# Altium PCB PCB1.PcbDoc (part 4 of 6)
Units mil, origin at the board's own origin, x right, y up, seen from the top; angles counter-clockwise.
Board outline 7480.32 x 4921.26 mil, 4 copper layers (Top Layer, GND, POWER, Bottom Layer), stack 23.756 mil thick; 513 components, 387 nets, 1792 pads, 594 vias.
Unrouted connection lines stored in the file: 21.
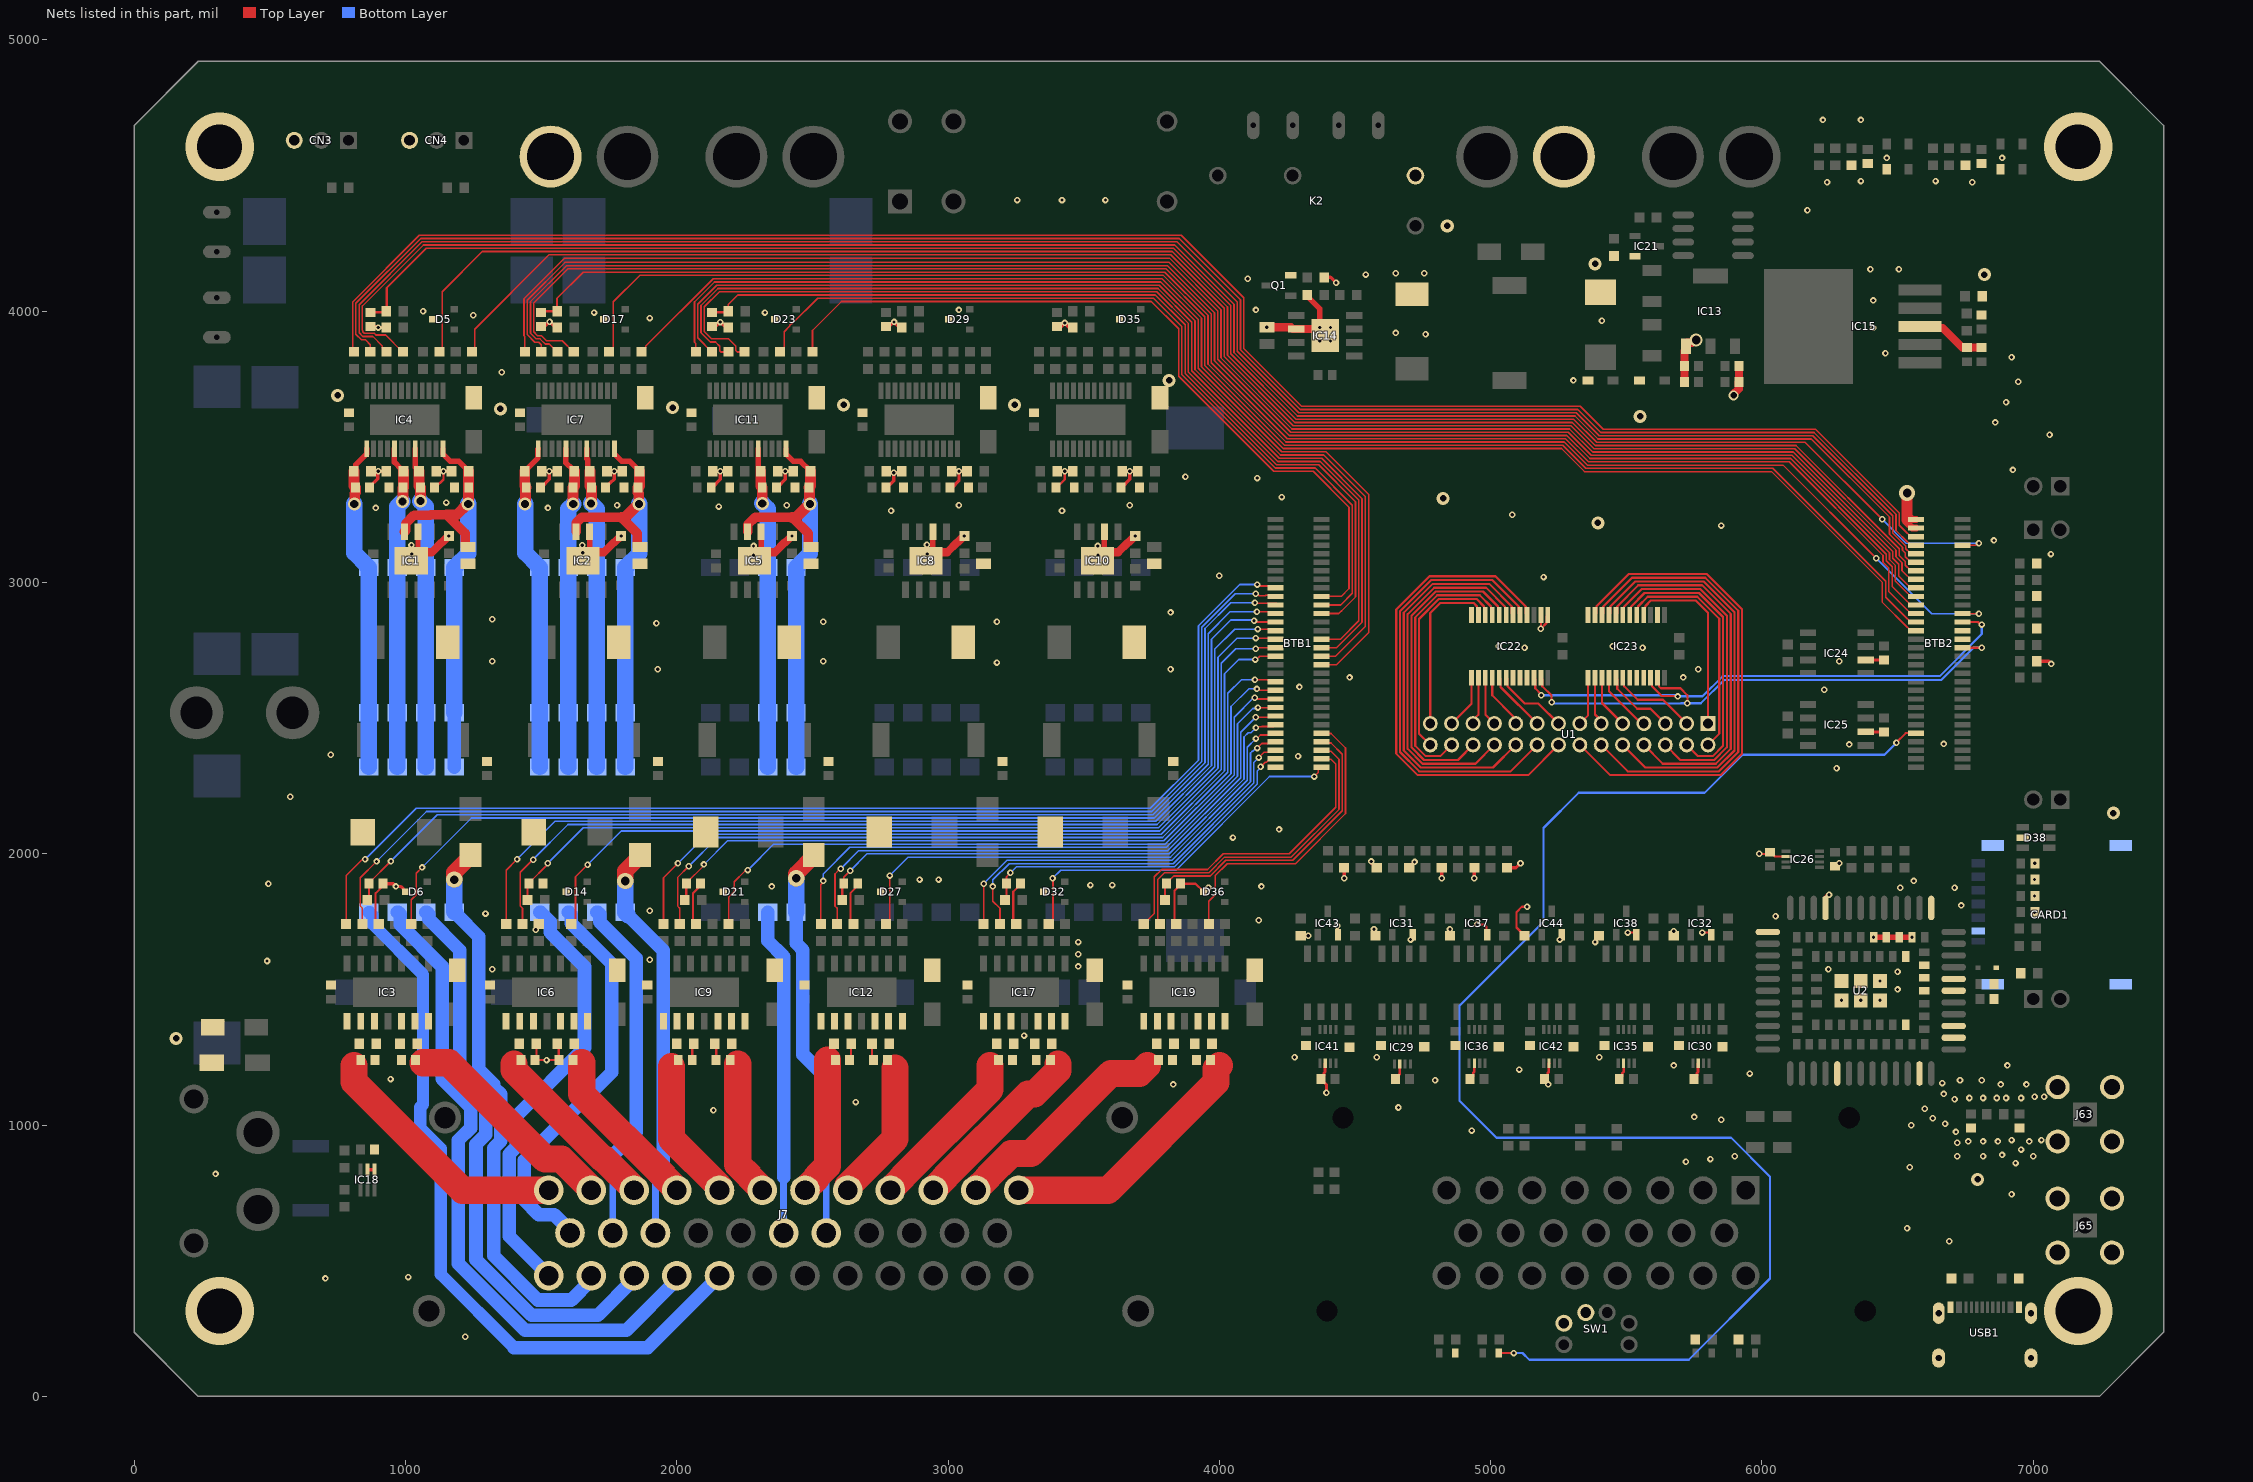
[diagram p5: the nets of this part, all layers, seen from the top]

## Via types
v1: diameter 24, hole 12, Top Layer to Bottom Layer, 532 vias
v2: diameter 48, hole 30, Top Layer to Bottom Layer, 20 vias
v3: diameter 48, hole 24, Top Layer to Bottom Layer, 16 vias
v4: diameter 48, hole 32, Top Layer to Bottom Layer, 10 vias
v5: diameter 60, hole 32, Top Layer to Bottom Layer, 7 vias
v6: diameter 251.97, hole 165.35, Top Layer to Bottom Layer, 4 vias
v7: diameter 31.5, hole 31.5, Top Layer to Bottom Layer, 2 vias
v8: diameter 47.24, hole 47.24, Top Layer to Bottom Layer, 2 vias
v9: diameter 36, hole 24, Top Layer to Bottom Layer, 1 vias

## Nets (pads, with @x,y where several pads share a name; then routed paths per layer and width w, separated by ;. In a path a pad name is that pad's centre, name@x,y a point inside that pad or via, vN(x,y) a via of type N, cw(c..) or ccw(c..) an arc to the next point about the centre after c; other vN are vias at no path point) (continued)
GND: *2.- BTB1.60 BTB2.31 BTB2.32 C1.2 C3.2 C4.2 C5.1 C6.1 C7.1 C8.1 C9.1 C10.1 C11.1 C12.1 C13.1 C15.2 C16.1 C17.1 C18.1 C19.2 C20.2 C21.1 C23.1 C24.2 C25.1 C26.1 C27.1 C28.1 C29.1 C30.1 C31.1 C32.2 C33.1 C35.2 C36.1 C37.1 C38.1 C39.2 C40.1 C41.1 C42.1 C44.2 C45.1 C46.1 C47.1 C48.1 C49.2 C50.1 C51.1 C52.1 C53.1 C54.1 C55.2 C56.1 C58.2 C59.2 C60.1 C61.1 C62.1 C63.1 C64.1 C65.1 C66.1 C67.1 C68.1 C69.1 C70.1 C71.1 C72.1 C73.1 C74.1 C75.2 C76.2 C77.1 C78.1 C79.1 C80.1 C81.1 C82.1 C83.1 C84.1 C85.1 C86.1 C87.1 C88.2 C89.2 C90.1 C91.1 C92.1 C93.1 C94.2 C95.2 C96.1 C97.2 C98.2 C99.2 C100.2 C101.2 C102.2 C103.2 C104.2 C105.2 C106.2 C107.2 C108.2 C109.2 C110.2 C111.2 CARD1.8 CARD1.9 CARD1.10 CARD1.11 CARD1.C5 CN1.- CN3.3 CN4.3 D1.2 D3.2 D4.2 D5.3 D6.3 D7.2 D8.1 D10.2 D12.2 D13.2 D14.3 D16.2 D17.3 D18.2 D20.2 D21.3 D22.2 D23.3 D25.2 D26.2 D27.3 D28.2 D29.3 D30.2 D31.2 D32.3 D33.2 D34.2 D35.3 D36.3 D37.1 D38.2 E1.2 E2.2 E5.2 E6.2 IC1.6 IC1.9 IC2.6 IC2.9 IC5.6 IC5.9 IC8.6 IC8.9 IC10.6 IC10.9 IC13.1 IC14.6 IC14.9 IC15.3 IC18.1 IC18.2 IC21.2 IC22.1 IC22.2 IC22.12 IC22.21 IC23.2 IC23.12 IC23.21 IC24.2 IC25.2 IC26.2 IC29.2 IC30.2 IC31.2 IC32.2 IC35.2 IC36.2 IC37.2 IC38.2 IC41.2 IC42.2 IC43.2 IC44.2 J63.2 J63.3 J63.4 J63.5 J65.2 J65.3 J65.4 J65.5 K2.1 LED1.2 Q1.2 R3.1 R7.1 R11.1 R13.1 R17.2 R19.2 R22.1 R23.1 R25.1 R27.1 R28.1 R32.1 R35.1 R39.2 R42.1 R45.1 R47.1 R48.2 R51.1 R53.1 R58.1 R60.1 R62.2 R64.1 R66.1 R71.1 R74.2 R77.1 R79.1 R82.1 R84.1 R87.2 R89.1 R91.1 R97.1 R100.2 R103.1 R105.1 R107.1 R112.2 R114.1 R115.1 R116.1 R123.1 R130.1 R132.1 R137.2 R138.2 R140.2 R143.1 R144.1 R148.2 R149.1 R155.2 R156.1 R157.1 R158.2 R160.2 R168.1 R170.1 R176.1 R177.2 R178.2 R181.2 R182.2 R183.2 R184.2 R187.2 R188.2 R189.2 R190.2 R193.2 R196.2 R199.2 R204.2 R205.2 R206.2 R207.2 R208.2 R211.2 R214.2 SW1.4 SW1.6 U2.1 U2.10 U2.27 U2.34 U2.36 U2.37 U2.40 U2.41 U2.45 U2.46 U2.47 U2.48 U2.70 U2.71 U2.72 U2.73 U2.88 U2.89 U2.90 U2.91 U2.92 U2.93 U2.94 U2.95 USB1.1 USB1.12 USB1.13 USB1.14 | length 7334.5
  Top Layer w8: R19.2@901.26,1741.5 890,1752.76 890,1855 917.24,1882.24 C11.1@917.24,1890 ; C9.1@1107.24,3350 1110,3350 1140,3380 v1(1140,3410) ; v1(1480,1720) 1480,1730.24 R39.2@1491.26,1741.5 R39.2@1486.57,1736.8 ; R42.1@1482.76,1300 1482.76,1245.51 C28.1@1477.24,1240 v1(1520,1240) C21.1@1565.28,1240 1565.28,1294.49 R32.1@1559.76,1300 ; C41.1@2057.24,1240 2057.24,1294.49 R64.1@2062.76,1300 ; R62.2@2071.26,1741.5 2060,1752.76 2060,1855 2087.24,1882.24 C40.1@2087.24,1890 ; R58.1@2139.76,1300 2145.28,1294.49 C38.1@2145.28,1240 ; C54.1@2637.24,1247.5 2642.76,1253.01 R89.1@2642.76,1300 ; R87.2@2651.26,1741.5 2640,1752.76 2640,1855 2667.24,1882.24 C53.1@2667.24,1890 ; R84.1@2719.76,1300 2719.76,1253.01 C52.1@2725.28,1247.5 ; R116.1@3242.76,1300 R116.1@3242.76,1300.98 ; R112.2@3251.26,1741.5 3240,1752.76 3240,1860 3267.24,1887.24 C72.1@3267.24,1890 ; C85.1@3397.24,3350 3400,3350 3430,3380 v1(3430,3410) ; R140.2@3841.26,1741.5 3835,1747.76 3835,1865 3857.24,1887.24 C82.1@3857.24,1890 3911.89,1890 D36.3@3941.89,1860 3945,1860 v1(3960,1875) ; R207.2@4300,1698.5 4300.1,1698.4 v1(4327.45,1698.4) ; v1(4435,1735) 4436.2,1733.8 4436.2,1710.39 IC43.2@4437.4,1709.19 ; v1(4570,1721.78) 4570,1703.5 R183.2@4575,1698.5 ; R188.2@4850,1698.5 v1(4850,1721.78) ; v1(4950,1740) 4975,1740 4985,1730 4985,1704.09 IC37.2@4987.4,1701.69 ; R208.2@5125,1698.5 5095,1728.5 5095,1785 5115,1805 v1(5134,1805) ; IC22.2@5185.16,2880.67 5185.08,2880.59 v1(5185.08,2829.63) 5206.02,2850.57 5206.02,2875.94 IC22.1@5210.75,2880.67 ; v1(5385,1675) 5385,1683.5 R190.2@5400,1698.5 ; v1(5505,1710) 5529.09,1710 IC38.2@5537.4,1701.69 ; v1(5780,1710) 5804.09,1710 IC32.2@5812.4,1701.69 ; v1(5990,2000) 6024.02,2000 C94.2@6030,2005.98 6032.17,2005.98 6048.15,1990 6087.83,1990 IC26.2@6087.99,1989.84 ; U2.10@6234.21,1800.55 6230,1804.76 6230,1840 6239,1849 v1(6247.21,1849) ; C89.2@6449.02,2715 C89.2@6450,2714.02 ; U2.1@6623.97,1800.55 U2.1@6625,1801.58
  Top Layer w10: C108.2@4374.02,1170 4385.35,1181.34 4385.35,1192.36 4389.25,1196.26 4389.25,1227.09 IC41.2@4390.16,1227.99 ; C100.2@4649.02,1170 4649.02,1172.17 4665,1188.15 IC29.2@4665,1225.98 ; C106.2@4924.02,1170 4935.35,1181.34 4935.35,1192.36 4939.25,1196.26 4939.25,1227.09 IC36.2@4940.16,1227.99 ; C110.2@5199.02,1170 5210.35,1181.34 5210.35,1192.36 5214.25,1196.26 5214.25,1227.09 IC42.2@5215.16,1227.99 ; C104.2@5474.02,1170 5485.35,1181.34 5485.35,1191.46 5490.16,1196.26 IC35.2@5490.16,1227.99 ; C102.2@5749.02,1170 5760.35,1181.34 5760.35,1192.36 5764.25,1196.26 5764.25,1227.09 IC30.2@5765.16,1227.99
  Top Layer w12: IC18.2@860,835.4 IC18.1@885.59,835.4 ; C16.1@867.24,3350 867.24,3352.17 897.94,3382.86 897.94,3407.94 v1(900,3410) ; C10.1@870.28,3944.02 895.98,3944.02 v1(900,3940) R17.2@928.78,3940 ; R25.1@872.76,3410 v1(900,3410) ; C11.1@917.24,1890 955,1890 v1(965,1880) 981.89,1880 D6.3@1001.89,1860 ; R22.1@929.76,3410 v1(900,3410) ; R13.1@1112.76,3410 v1(1140,3410) R3.1@1169.76,3410 ; C33.1@1497.24,3350 1500,3350 1530,3380 v1(1530,3410) ; C30.1@1500.28,3944.02 1513.77,3944.02 v1(1531.32,3961.57) 1552.9,3940 R48.2@1558.78,3940 ; R53.1@1502.76,3410 v1(1530,3410) ; R51.1@1559.76,3410 v1(1530,3410) ; C29.1@1737.24,3352.24 1770,3380 v1(1770,3410) ; R45.1@1742.76,3410 v1(1770,3410) ; R35.1@1799.76,3410 v1(1770,3410) ; C51.1@2127.24,3350 2130,3350 2160,3380 v1(2160,3410) ; C48.1@2130.28,3944.02 2144.02,3944.02 v1(2160,3960) 2180,3940 R74.2@2189.76,3940 ; R82.1@2132.76,3410 v1(2160,3410) ; R77.1@2188.27,3410 v1(2160,3410) ; C45.1@2367.24,3350 2370,3350 2400,3380 v1(2400,3410) ; R71.1@2372.76,3410 v1(2400,3410) ; R66.1@2429.76,3410 v1(2400,3410) ; C73.1@2771.26,3350 2775,3350 2800,3375 v1(2800,3405) ; C62.1@2771.26,3944.02 2784.02,3944.02 2800.62,3960.62 v1(2800.8,3960.62) ; R115.1@2772.76,3410 2777.76,3405 v1(2800,3405) ; v1@2800,3960 R100.2@2820,3940 ; R105.1@2829.76,3410 2824.76,3405 v1(2800,3405) ; C61.1@3007.24,3350 3015,3350 3040,3375 3040,3407.99 v1@3042.01,3410 ; R97.1@3014.25,3410 v1(3040,3410) v1@3042.01,3410 ; R91.1@3069.76,3410 v1@3042.01,3410 ; C81.1@3401.26,3944.02 3419.02,3944.02 v1@3430,3955 ; R149.1@3402.76,3410 v1(3430,3410) R143.1@3459.76,3410 ; v1(3430,3957) v1@3430,3955 ; R138.2@3459.76,3940 3445,3940 v1@3430,3955 ; C80.1@3637.24,3350 3640,3350 3670,3380 v1(3670,3410) ; R132.1@3642.76,3410 v1(3670,3410) ; R123.1@3699.76,3410 v1(3670,3410) ; C108.2@4374.02,1170 4395,1149.02 4395,1120 v1(4394.52,1119.52) ; R28.1@4386.5,4125 4410,4125 v1(4430,4105) ; v1(4460,1910) R160.2@4460,1948.5 ; v1(4559.98,1971.82) 4562.27,1969.52 4562.27,1965.25 4579.02,1948.5 R155.2@4580,1948.5 ; R193.2@4700,1948.5 4700,1950.43 v1(4719.64,1970.06) ; v1(4820,1910) R148.2@4820,1948.5 ; v1(4940,1910) R137.2@4940,1948.5 ; R196.2@5060,1948.5 5093.5,1948.5 v1(5110,1965) ; C110.2@5199.02,1170 5212.71,1156.31 v1(5212.71,1149.83) ; R158.2@5455,4203.5 R158.2@5456.75,4201.75 ; IC21.2@5531.27,4202.18 IC21.2@5531.69,4202.6 ; C95.2@6270,1954.02 6280.98,1965 v1(6285,1965) ; IC25.2@6382.6,2450 6383.09,2449.51 6449.51,2449.51 C88.2@6450,2449.02 ; IC24.2@6382.6,2715 6383.09,2714.51 6448.52,2714.51 C89.2@6449.02,2715 ; v1(6411.37,1692.28) U2.48@6411.37,1696.37 ; R204.2@7012.99,2710 7056.75,2710 7066,2700.75 v1(7066,2700)
  Top Layer w20: IC1.9@1046.26,3111.75 IC1.6@1046.26,3186.77 ; IC2.9@1678.76,3111.75 IC2.6@1678.76,3186.77 ; IC5.9@2311.26,3111.75 IC5.6@2311.26,3186.77 ; IC8.9@2943.76,3111.75 IC8.6@2943.76,3186.77 ; IC10.9@3576.26,3111.75 IC10.6@3576.26,3186.77 ; R103.1@4323.5,4060 4323.5,4056.5 4370,4010 v1(4370,3940) ; v1(6411.37,1692.28) U2.46@6505.86,1692.28 v1(6553.11,1692.28)
  Top Layer w25: 6535,3229.98 6535,3219.92 6554.13,3200.79 BTB2.32@6568.5,3200.79 ; 6535,3252.13 6535,3251.42 6554.13,3232.28 BTB2.31@6568.5,3232.28
  Top Layer w30: v1(1023,3105) 1029.75,3111.75 1046.26,3111.75 1097.13,3111.75 1132.6,3147.22 1134.74,3147.22 1159.02,3171.5 v1(1160,3171.5) ; v1(1653,3110) 1654.75,3111.75 1678.76,3111.75 1732.13,3111.75 1767.6,3147.22 1769.74,3147.22 1794.02,3171.5 v1(1795,3171.5) ; v1(2282.5,3100.81) 2281.66,3101.66 2301.16,3101.66 2311.26,3111.75 2362.13,3111.75 2397.6,3147.22 2399.74,3147.22 2424.02,3171.5 v1(2425,3171.5) ; v1(2923,3105) 2937.01,3105 2943.76,3111.75 2997.13,3111.75 3032.6,3147.22 3034.74,3147.22 3059.02,3171.5 v1(3060,3171.5) ; v1(3552.5,3100.81) 3563.44,3111.75 3576.26,3111.75 3627.13,3111.75 3662.6,3147.22 3664.74,3147.22 3689.02,3171.5 v1(3690,3171.5) ; v1(4175,3941.1) 4264.31,3941.1 4270.41,3935 IC14.6@4283.23,3935 4365,3935 v1(4370,3940) ; C69.1@5714.02,3738.74 C68.1@5714.02,3798.74 5714.02,3854.41 5719.84,3860.24 5719.84,3879.92 5723.54,3883.62 5742.05,3883.62 5752.43,3894 v4(5757.3,3894) ; v9(5895.18,3689.64) 5895.18,3694.51 5914.65,3713.98 5914.65,3737.4 C70.1@5915.98,3738.74 C71.1@5915.98,3798.74 ; IC15.3@6582.76,3944.19 6588.25,3938.7 6666.3,3938.7 6737.68,3867.32 6753.66,3867.32 C65.1@6755,3865.98 C66.1@6810,3865.98
  Top Layer w40: 6535,3229.98 6535,3251.42 ; 6535,3252.13 v5(6535,3330)
  other v1: 1220,220 705,435 1010,440 6690.62,571.86 6535,620 6920,745 300,820 6545,845 6935,860 5720,865 5810,875 5900,885 6720,885 6815,885 7000,885 6885,890 6955,910 6720,935 6760,940 6815,940 6870,940 6985,940 6920,945 7030,945 6715,975 4930,980 6550,1000 6675,1005 5850,1020 6630,1025 5750,1030 2135,1055 6600,1060 4660,1065 2660,1085 6710,1095 6765,1100 6815,1100 6865,1100 6900,1100 6955,1100 7005,1105 7040,1105 6670,1115 3830,1150 6880,1150 6975,1150 6665,1155 4795,1165 6730,1165 6810,1165 945,1170 5955,1190 5105,1205 5675,1220 6905,1220 4277,1250 4580,1250 5400,1250 3280,1330 6293.26,1460 6364.13,1460 6435,1460 6500,1500 6435,1530.86 6500,1565 1320,1575 6245,1575 3480,1585 490,1605 1900,1610 3480,1630 3480,1675 4705,1683.79 5254.35,1683.79 5675,1715 4145,1755 6050,1770 1295,1780 7005,1785 1900,1790 6735,1810 7005,1845 6510,1875 6710,1875 2350,1880 4155,1880 3525,1885 3605,1885 495,1890 6560,1900 2895,1905 2965,1905 7005,1905 7005.98,1965 4050,2060 4220,2090 575,2210 6275,2315 4290,2360 725,2365 6321.77,2403.23 6670,2405 6230,2605 4295,2615 4480,2650 5710,2650 1930,2680 3820,2680 5765,2680 3180,2705 1320,2710 2540,2710 6285,2710 5125,2760 5560,2760 5030,2765 5450,2765 1925,2850 2540,2855 3180,2855 1320,2865 3820,2890 5195,3020 4000,3025 7065,3105 2283,3135 3552,3135 1652,3137.11 1022,3138.33 2922,3138.89 6855,3155 5850,3210 5080,3250 2790,3265 3420,3265 890,3275 1525,3275 2155,3280 1780,3285 2405,3285 3040,3285 3670,3285 1150,3295 4230,3315 4140,3385 3875,3390 6925,3415 7060,3545 6860,3590 6900,3665 6945,3740 5305,3745 1355,3775 6920,3830 6455,3845 4370,3890 4410,3890 4760,3915 4650,3920 4410,3940 6410,3940 5410,3965 1900,3975 1250,3985 1695,3995 2325,3995 1065,4000 3040,4005 4135,4005 6410,4040 4105,4120 4540,4135 4650,4140 4755,4140 6400,4155 6505,4155 6167.75,4372.25 3255,4410 3420,4410 3580,4410 6240,4475 6775,4475 6365,4480 6640,4480 6460,4565 6885,4565 6225,4705 6365,4705
  other v3: 6795,800 155,1320 7295,2150 5395,3220 4825,3310 5551.35,3612.54 1350,3640 1985,3645 2615,3655 3245,3655 750,3690 3815,3745 6820,4135 5385,4175 4840,4315
  other v6: 314.96,314.96 7165.35,314.96 314.96,4606.3 7165.35,4606.3
hpHSD1_DSEL_PTD4: BTB1.40 R16.1 | length 4276.8
  Top Layer w6: R16.1@841.26,1741.5 841.26,1799.36 833.05,1807.57 833.05,1911.79 v1(893.26,1972) ; v1(4134.09,2959.01) 4138.6,2959.01 4146.61,2951 4169.11,2951 4171.29,2953.18 4201.94,2953.18 BTB1.40@4206.3,2948.82
  Bottom Layer w6: v1(893.26,1972) 1077.26,2156 3750.53,2156 3935,2340.47 3935,2835.56 4058.44,2959.01 v1(4134.09,2959.01)
hpHSD1_IN0_PTB12: BTB1.42 R8.1 | length 4042.5
  Top Layer w6: R8.1@1021.26,1741.5 1021.26,1830.67 1039.26,1848.67 1039.26,1928 v1(1061.26,1950) ; v1(4138.31,2891.95) 4205.58,2891.95 BTB1.42@4206.3,2892.67
  Bottom Layer w6: v1(1061.26,1950) 1243.26,2132 3760.47,2132 3959,2330.53 3959,2811.74 4039.21,2891.95 v1(4138.31,2891.95)
hpHSD1_IN1_PTB11: BTB1.39 R20.1 | length 4342.9
  Top Layer w6: R20.1@781.26,1741.5 781.26,1920 841.26,1980 v1(851.26,1980) ; v1(4139.58,2992.56) 4144.45,2992.56 4149.86,2987.16 4199.46,2987.16 BTB1.39@4206.3,2980.32
  Bottom Layer w6: v1(851.26,1980) 1039.26,2168 3745.56,2168 3923,2345.44 3923,2840.53 4075.03,2992.56 v1(4139.58,2992.56)
hpHSD1_IS_PTD22: BTB1.41 C11.2 R14.1 | length 4136.7
  Top Layer w6: C11.2@865.28,1890 865.28,1892.17 946.11,1973 v1(946.26,1973) ; v1(4130.97,2925.15) 4131.95,2924.17 4209.53,2924.17 BTB1.41@4216.38,2917.32
  Top Layer w8: R14.1@859.76,1830 865.28,1835.51 C11.2@865.28,1890
  Bottom Layer w6: v1(946.26,1973) 1117.26,2144 3755.5,2144 3947,2335.5 3947,2830.59 4041.56,2925.15 v1(4130.97,2925.15)
hpHSD1_OUT0: C8.2 IC3.12 IC3.13 IC3.14 J7.11 R11.2 | length 817.6
  Top Layer w100: 1065,1230 1160,1230 1515.37,874.63 1575.2,874.63 1683.43,766.4 1683.43,761.77 J7.11@1685.2,760
hpHSD1_OUT1: C13.2 IC3.8 IC3.9 IC3.10 J7.12 R23.2 | length 943.4
  Top Layer w100: 810,1220 810,1160 1210,760 J7.12@1527.72,760
hpHSD2_DSEL_PTD21: BTB1.44 R36.1 | length 3617.6
  Top Layer w6: R36.1@1431.26,1741.5 1431.26,1799.36 1423.05,1807.57 1423.05,1931.79 1469.26,1978 v1(1471.26,1978) ; v1(4141.75,2828.35) 4212.27,2828.35 BTB1.44@4217.78,2822.83
  Bottom Layer w6: v1(1471.26,1978) 1471.26,1980 1599.26,2108 3770.41,2108 3983,2320.59 3983,2754.74 4056.61,2828.35 v1(4141.75,2828.35)
hpHSD2_IN0_PTA17: BTB1.46 R30.1 | length 3340
  Top Layer w6: R30.1@1611.26,1741.5 1612.24,1741.5 1626.96,1756.21 1626.96,1915.7 v1(1671.26,1960) ; v1(4133.86,2755.91) 4137.3,2759.35 4154.63,2759.35 4155.12,2759.84 BTB1.46@4206.3,2759.84
  Bottom Layer w6: v1(1671.26,1960) 1795.26,2084 3780.35,2084 4007,2310.65 4007,2702.74 4060.17,2755.91 v1(4133.86,2755.91)
hpHSD2_IN1_PTB13: BTB1.43 R40.1 | length 3691.1
  Top Layer w6: R40.1@1371.26,1741.5 1371.26,1940 v1(1411.26,1980) ; v1(4127.85,2859.6) 4132.72,2859.6 4137.99,2854.33 BTB1.43@4206.3,2854.33
  Bottom Layer w6: v1(1411.26,1980) 1551.26,2120 3765.44,2120 3971,2325.56 3971,2790.74 4042.26,2862 4125.45,2862 v1(4127.85,2859.6)
hpHSD2_IS_PTD20: BTB1.45 C27.2 R34.1 | length 3438.6
  Top Layer w6: C27.2@1455.28,1890 1455.28,1892.17 1524.26,1961.15 v1(1524.26,1965) ; v1(4133.86,2795.28) BTB1.45@4213.47,2795.28
  Top Layer w8: R34.1@1449.76,1830 1449.76,1884.49 C27.2@1455.28,1890
  Bottom Layer w6: v1(1524.26,1965) 1655.26,2096 3775.38,2096 3995,2315.62 3995,2724.74 4065.54,2795.28 v1(4133.86,2795.28)
hpHSD2_OUT0: C21.2 IC6.12 IC6.13 IC6.14 J7.9 R32.2 | length 615
  Top Layer w100: 1650,1230 1650,1114.78 1957.3,807.48 1957.3,805.36 2000.16,762.5 J7.9@2000.16,760
hpHSD2_OUT1: C28.2 IC6.8 IC6.9 IC6.10 J7.10 R42.2 | length 651.1
  Top Layer w100: 1400,1225 1400,1202.68 1728.05,874.63 1732.68,874.63 1840.91,766.4 1840.91,761.77 J7.10@1842.68,760
hpHSD3_DSEL_PTE4: BTB1.50 R61.1 | length 2853.9
  Top Layer w6: R61.1@2011.26,1741.5 2011.26,1799.36 2003.05,1807.57 2003.05,1912.79 v1(2044.26,1954) ; v1(4131,2642) 4176.26,2642 4177.56,2640.7 4199.46,2640.7 BTB1.50@4206.3,2633.86
  Bottom Layer w6: v1(2044.26,1954) 2150.26,2060 3790.3,2060 4031,2300.7 4031,2591.74 4081.26,2642 v1(4131,2642)
hpHSD3_IN0_PTE10: BTB1.52 R56.1 | length 2565.9
  Top Layer w6: R56.1@2191.26,1741.5 2191.26,1841.05 2212.19,1861.98 2212.19,1897.28 2251.47,1936.56 2257.82,1936.56 v1(2261.26,1940) ; v1(4130,2575) 4134.87,2575 4139,2570.87 BTB1.52@4206.3,2570.87
  Bottom Layer w6: v1(2261.26,1940) 2357.26,2036 3800.24,2036 4055,2290.76 4055,2504 4126,2575 v1(4130,2575)
hpHSD3_IN1_PTA27: BTB1.47 R63.1 | length 2973.9
  Top Layer w6: R63.1@1951.26,1741.5 1951.26,1912 v1(2004.26,1965) ; v1(4132,2716) 4136.87,2716 4149.22,2728.35 BTB1.47@4206.3,2728.35
  Bottom Layer w6: v1(2004.26,1965) 2111.26,2072 3785.32,2072 4019,2305.68 4019,2663.74 4071.8,2716.54 4131.46,2716.54 v1(4132,2716)
hpHSD3_IS_PTE5: BTB1.51 C40.2 R59.1 | length 2681.4
  Top Layer w6: C40.2@2035.28,1890 2035.28,1892.17 2100.26,1957.15 v1(2100.26,1961) ; v1(4138.5,2607.92) 4143.37,2607.92 4148.93,2602.36 BTB1.51@4206.3,2602.36
  Top Layer w8: R59.1@2029.76,1830 2035.28,1835.51 C40.2@2035.28,1890
  Bottom Layer w6: v1(2100.26,1961) 2187.26,2048 3795.27,2048 4043,2295.73 4043,2543 4107.92,2607.92 v1(4138.5,2607.92)
hpHSD3_OUT0: C38.2 IC9.12 IC9.13 IC9.14 J7.7 R58.2 | length 499.8
  Top Layer w100: 2225,1225 2225,854.91 2272.26,807.64 2272.26,805.36 2313.35,764.27 J7.7@2313.35,761.77
hpHSD3_OUT1: C41.2 IC9.8 IC9.9 IC9.10 J7.8 R64.2 | length 528.6
  Top Layer w100: 1980,1215 1980,950 2155.87,774.13 2155.87,761.77 J7.8@2157.64,760
hpHSD4_DSEL_PTA20: BTB1.54 R86.1 | length 2152.7
  Top Layer w6: R86.1@2591.26,1741.5 2591.26,1799.36 2583.05,1807.57 2583.05,1925.77 2599.39,1942.11 2599.39,1945 v1(2604.26,1945) ; v1(4134,2503) BTB1.54@4209.39,2503
  Bottom Layer w6: v1(2604.26,1945) 2671.26,2012 3810.18,2012 4079,2280.82 4079,2448 v1(4134,2503)
hpHSD4_IN0_PTE15: BTB1.56 R81.1 | length 1894.4
  Top Layer w6: R81.1@2771.26,1741.5 2785,1755.24 v1(2785,1920) ; v1(4135,2425) 4138.62,2425 4151.66,2438.04 4199.46,2438.04 BTB1.56@4206.3,2444.88
  Bottom Layer w6: v1(2785,1920) 2853,1988 3820.12,1988 4103,2270.88 4103,2393 v1(4135,2425)
hpHSD4_IN1_PTE11: BTB1.53 R88.1 | length 2221.7
  Top Layer w6: R88.1@2531.26,1741.5 2531.26,1886.39 2540,1895.13 v1(2540,1900) ; v1(4142,2539) 4205.93,2539 BTB1.53@4206.3,2539.37
  Bottom Layer w6: v1(2540,1900) 2540,1925.99 2638.01,2024 3805.21,2024 4067,2285.79 4067,2479 4123.56,2535.56 4138.56,2535.56 v1(4142,2539)
hpHSD4_IS_PTE16: BTB1.55 C53.2 R85.1 | length 2001.1
  Top Layer w6: C53.2@2615.28,1890 2615.28,1914.02 v1(2639.26,1938) ; v1(4135,2465) 4138.44,2468.44 4155.31,2468.44 4156.41,2469.54 4199.46,2469.54 BTB1.55@4206.3,2476.38
  Top Layer w8: R85.1@2609.76,1830 2609.76,1884.49 C53.2@2615.28,1890
  Bottom Layer w6: v1(2639.26,1938) 2701.26,2000 3815.15,2000 4091,2275.85 4091,2431 4106.41,2446.41 4116.41,2446.41 v1(4135,2465)
hpHSD4_OUT0: C52.2 IC12.12 IC12.13 IC12.14 J7.5 R84.2 | length 522.5
  Top Layer w100: J7.5@2630.08,760 2631.85,761.77 2631.85,776.85 2805,950 2805,1210
hpHSD4_OUT1: C54.2 IC12.8 IC12.9 IC12.10 J7.6 R89.2 | length 511.6
  Top Layer w100: J7.6@2474.37,761.77 2474.37,764.27 2515.45,805.36 2515.45,809.4 2525.85,819.79 2525.85,820.76 2555,849.91 2555,1240
hpHSD5_DSEL_PTD1: BTB1.58 R111.1 | length 1457.2
  Top Layer w6: v1(3165,1880) 3165,1825.62 3191.26,1799.36 R111.1@3191.26,1741.5 ; v1(4145,2355) 4165.05,2375.05 4199.46,2375.05 BTB1.58@4206.3,2381.89
  Bottom Layer w6: v1(3165,1880) 3165,1904 3225,1964 3830.06,1964 4127,2260.94 4127,2337 v1(4145,2355)
hpHSD5_IN0_PTA19: BTB1.1 R102.1 | length 1344.3
  Top Layer w6: R102.1@3371.26,1741.5 3372.24,1741.5 3386.96,1756.21 3386.96,1908.04 v1(3385,1910) ; v1(4350,2285) 4364.85,2299.85 4364.85,2312.05 4371.69,2318.9 BTB1.1@4376.38,2318.9
  Bottom Layer w6: v1(3385,1910) 3415,1940 3840,1940 4185,2285 v1(4350,2285)
hpHSD5_IN1_PTA21: BTB1.57 R113.1 | length 1502.2
  Top Layer w6: R113.1@3131.26,1741.5 3132,1742.24 v1(3132,1890) ; v1(4140,2390) 4156.54,2406.54 4179.77,2406.54 4186.61,2413.39 BTB1.57@4206.3,2413.39
  Bottom Layer w6: v1(3132,1890) 3132,1890.74 3217.26,1976 3825.09,1976 4115,2265.91 4115,2371.49 4121.59,2378.07 4123.2,2378.07 4135.13,2390 v1(4140,2390)
hpHSD5_IS_PTD0: BTB1.59 C72.2 R110.1 | length 1289.2
  Top Layer w6: C72.2@3215.28,1890 3215.28,1915.28 v1(3230,1930) ; v1(4152,2320.78) 4168.96,2337.74 4173.96,2337.74 4186.61,2350.39 BTB1.59@4206.3,2350.39
  Top Layer w8: R110.1@3209.76,1830 3215.28,1835.51 C72.2@3215.28,1890
  Bottom Layer w6: v1(3230,1930) 3252,1952 3835.03,1952 4139,2255.97 4139,2304.08 4152,2317.08 v1(4152,2320.78)
hpHSD5_OUT0: C64.2 IC17.12 IC17.13 IC17.14 J7.3 R107.2 | length 669.1
  Top Layer w100: J7.3@2945.04,760 2945.04,762.5 2987.89,805.36 2987.89,807.48 3295.41,1115 3318.67,1115 3405,1201.33 3405,1225
hpHSD5_OUT1: C74.2 IC17.8 IC17.9 IC17.10 J7.4 R116.2 | length 612.2
  Top Layer w100: J7.4@2787.56,760 2787.56,762.5 2830.41,805.36 2830.41,807.48 3155,1132.07 3155,1220
hpHSD6_DSEL_PTE26: BTB1.3 R135.1 | length 1205.7
  Top Layer w6: R135.1@3781.26,1741.5 3773.05,1749.71 3773.05,1905.34 3798.12,1930.42 3961.48,1930.42 4019.06,1988 4265.26,1988 4441,2163.74 4441,2349 4411.39,2378.61 4379.66,2378.61 BTB1.3@4376.38,2381.89
hpHSD6_IN0_PTA12: BTB1.5 R127.1 | length 1115.9
  Top Layer w6: R127.1@3961.26,1741.5 3961.26,1825.67 3985,1849.41 3985,1920 4029,1964 4280.64,1964 4465,2148.36 4465,2390 4411.39,2443.61 4377.65,2443.61 BTB1.5@4376.38,2444.88
hpHSD6_IN1_PTA18: BTB1.2 R141.1 | length 1184.9
  Top Layer w6: R141.1@3721.26,1741.5 3760,1780.24 3760,1915.13 3787.29,1942.42 3956.51,1942.42 4014.09,2000 4257.26,2000 4429,2171.74 4429,2331 4411.39,2348.61 4378.16,2348.61 BTB1.2@4376.38,2350.39
hpHSD6_IS_PTE1: BTB1.4 C82.2 R133.1 | length 1126.7
  Top Layer w6: C82.2@3805.28,1890 3805.28,1892.17 3831.53,1918.42 3966.45,1918.42 4024.03,1976 4270.23,1976 4453,2158.77 4453,2367 4411.39,2408.61 4381.15,2408.61 BTB1.4@4376.38,2413.39
  Top Layer w8: R133.1@3799.76,1830 3799.76,1884.49 C82.2@3805.28,1890
hpHSD6_OUT0: C79.2 IC19.12 IC19.13 IC19.14 J7.1 R130.2 | length 959.8
  Top Layer w100: J7.1@3260,760 3590,760 3987.61,1157.61 3987.61,1207.61 4000,1220
hpHSD6_OUT1: C84.2 IC19.8 IC19.9 IC19.10 J7.2 R144.2 | length 825.7
  Top Layer w100: J7.2@3102.52,760 3102.52,762.5 3145.37,805.36 3145.37,807.48 3232.89,895 3305,895 3600.2,1190.2 3705.2,1190.2 3735,1220
I2C0_SCL_PTC8: BTB2.16
I2C0_SDA_PTC9: BTB2.17
I2C1_SCL_PTC28: BTB2.18 IC22.22 IC23.22 | length 2051.4
  Top Layer w8: IC22.22@5159.57,2649.33 5164.43,2644.47 5164.43,2610.05 5186.87,2587.61 v1(5186.87,2584.4) ; IC23.22@5589.57,2649.33 5594.43,2644.47 5594.43,2618.03 5630.77,2581.68 5688.32,2581.68 v1(5690,2580) ; BTB2.18@6738.58,2854.33 6796.34,2854.33 6805.67,2845 v1(6810,2845)
  Bottom Layer w8: v1(5186.87,2584.4) 5681.27,2584.4 5685.67,2580 v1(5690,2580) 5691,2581 5781,2581 5855,2655 6655,2655 6810,2810 v1(6810,2845)
I2C1_SDA_PTC29: BTB2.15 IC22.23 IC23.23 | length 2033
  Top Layer w8: IC22.23@5185.16,2649.33 5190.02,2644.47 5190.02,2618.03 5224.04,2584 5224.04,2559.36 v1(5225,2558.4) ; IC23.23@5615.16,2649.33 5620.02,2644.47 5620.02,2618.03 5627.75,2610.3 5699.7,2610.3 5725,2585 v1(5725,2555) ; BTB2.15@6738.58,2759.84 6738.66,2759.92 6809.92,2759.92 v1(6810,2760)
  Bottom Layer w8: v1(5225,2558.4) 5229.33,2558.4 5233.73,2554 5700.77,2554 5701.77,2555 v1(5725,2555) 5775,2555 5861,2641 6661,2641 6780,2760 v1(6810,2760)
IIC1_SCL0: IC22.5 U1.18 | length 1653.1
  Top Layer w8: IC22.5@5108.39,2880.67 5103.53,2885.53 5103.53,2911.97 5006.5,3009 4780.21,3009 4665.96,2894.76 4665.96,2375.17 4737.11,2304.02 5073.66,2304.02 U1.18@5171.22,2401.58
IIC1_SCL1: IC22.7 U1.22 | length 1328.5
  Top Layer w8: U1.22@5013.74,2401.58 4944.18,2332.02 4748.71,2332.02 4693.96,2386.76 4693.96,2883.16 4791.8,2981 4983.32,2981 5052.35,2911.97 5052.35,2885.53 IC22.7@5057.2,2880.67
IIC1_SCL2: IC22.9 U1.26 | length 1003.8
  Top Layer w8: U1.26@4856.26,2401.58 4814.7,2360.02 4760.31,2360.02 4721.96,2398.36 4721.96,2871.56 4803.4,2953 4960.14,2953 5001.17,2911.97 5001.17,2885.53 IC22.9@5006.02,2880.67
IIC1_SCL3: IC22.11 U1.27 | length 633.9
  Top Layer w8: U1.27@4777.52,2480.32 4777.52,2887.52 4815,2925 4936.96,2925 4949.98,2911.97 4949.98,2885.53 IC22.11@4954.84,2880.67
IIC1_SCL4: IC22.14 U1.23 | length 177.2
  Top Layer w8: U1.23@4935,2480.32 4935,2493.06 4954.84,2512.91 IC22.14@4954.84,2649.33
IIC1_SCL5: IC22.16 U1.19 | length 204.8
  Top Layer w8: IC22.16@5006.02,2649.33 5006.02,2583.98 5083.47,2506.53 5083.47,2489.33 U1.19@5092.48,2480.32
IIC1_SCL6: IC22.18 U1.15 | length 278.3
  Top Layer w8: IC22.18@5057.2,2649.33 5062.06,2644.47 5062.06,2618.03 5126.41,2553.68 5176.6,2553.68 U1.15@5249.96,2480.32
IIC1_SCL7: IC22.20 | length 6.9
  Top Layer w8: IC22.20@5108.39,2649.33 IC22.20@5113.24,2644.47
IIC1_SCL8: IC23.5 U1.2 | length 863.7
  Top Layer w8: IC23.5@5538.39,2880.67 5543.24,2885.53 5543.24,2911.97 5578.98,2947.7 5762.09,2947.7 5842.7,2867.1 5842.7,2443.13 U1.2@5801.14,2401.58
IIC1_SCL9: IC23.7 U1.6 | length 1234
  Top Layer w8: IC23.7@5487.2,2880.67 5492.06,2885.53 5492.06,2911.97 5555.79,2975.7 5773.69,2975.7 5870.7,2878.7 5870.7,2392.56 5824.15,2346.02 5699.22,2346.02 U1.6@5643.66,2401.58
IIC1_SCL10: IC23.9 U1.10 | length 1558.6
  Top Layer w8: IC23.9@5436.02,2880.67 5440.88,2885.53 5440.88,2911.97 5532.61,3003.7 5785.29,3003.7 5898.7,2890.29 5898.7,2380.96 5835.75,2318.02 5569.74,2318.02 U1.10@5486.18,2401.58
IIC1_SCL11: IC23.11 U1.14 | length 1883.3
  Top Layer w8: U1.14@5328.7,2401.58 5440.26,2290.02 5847.35,2290.02 5926.7,2369.37 5926.7,2901.89 5796.89,3031.7 5509.43,3031.7 5389.7,2911.97 5389.7,2885.53 IC23.11@5384.84,2880.67
IIC1_SCL12: IC23.14 U1.11 | length 178.4
  Top Layer w8: IC23.14@5384.84,2649.33 5384.84,2513.66 5407.44,2491.07 U1.11@5407.44,2480.32
IIC1_SCL13: IC23.16 U1.7 | length 228.4
  Top Layer w8: IC23.16@5436.02,2649.33 5436.02,2598.98 5554.68,2480.32 U1.7@5564.92,2480.32
IIC1_SCL14: IC23.18 U1.3 | length 320.7
  Top Layer w8: IC23.18@5487.2,2649.33 5492.06,2644.47 5492.06,2618.03 5542.41,2567.68 5635.04,2567.68 U1.3@5722.4,2480.32
IIC1_SCL15: IC23.20
IIC1_SDA0: IC22.4 U1.16 | length 1815.4
  Top Layer w8: IC22.4@5133.98,2880.67 5129.12,2885.53 5129.12,2911.97 5018.09,3023 4774.41,3023 4651.96,2900.55 4651.96,2369.37 4731.31,2290.02 5138.4,2290.02 U1.16@5249.96,2401.58
IIC1_SDA1: IC22.6 U1.20 | length 1490.8
  Top Layer w8: IC22.6@5082.8,2880.67 5077.94,2885.53 5077.94,2911.97 4994.91,2995 4786.01,2995 4679.96,2888.96 4679.96,2380.96 4742.91,2318.02 5008.92,2318.02 U1.20@5092.48,2401.58
IIC1_SDA2: IC22.8 U1.24 | length 1166.2
  Top Layer w8: U1.24@4935,2401.58 4879.44,2346.02 4754.51,2346.02 4707.96,2392.56 4707.96,2877.36 4797.6,2967 4971.73,2967 5026.76,2911.97 5026.76,2885.53 IC22.8@5031.61,2880.67
IIC1_SDA3: IC22.10 U1.28 | length 795.9
  Top Layer w8: U1.28@4777.52,2401.58 4735.96,2443.13 4735.96,2865.76 4809.2,2939 4948.55,2939 4975.57,2911.97 4975.57,2885.53 IC22.10@4980.43,2880.67
IIC1_SDA4: IC22.13 U1.25 | length 199.3
  Top Layer w8: U1.25@4856.26,2480.32 4929.25,2553.31 IC22.13@4929.25,2649.33
IIC1_SDA5: IC22.15 U1.21 | length 182.8
  Top Layer w8: IC22.15@4980.43,2649.33 4980.43,2513.62 U1.21@5013.74,2480.32
IIC1_SDA6: IC22.17 U1.17 | length 226.8
  Top Layer w8: IC22.17@5031.61,2649.33 5036.47,2644.47 5036.47,2615.06 U1.17@5171.22,2480.32
IIC1_SDA7: IC22.19
IIC1_SDA8: IC23.4 U1.1 | length 701.7
  Top Layer w8: IC23.4@5563.98,2880.67 5568.83,2885.53 5568.83,2908.52 5570.71,2910.39 5570.71,2913.85 5590.57,2933.7 5756.3,2933.7 5801.14,2888.86 U1.1@5801.14,2480.32
IIC1_SDA9: IC23.6 U1.4 | length 1071.7
  Top Layer w8: IC23.6@5512.8,2880.67 5517.65,2885.53 5517.65,2911.97 5567.39,2961.7 5767.89,2961.7 5856.7,2872.9 5856.7,2398.36 5818.35,2360.02 5763.96,2360.02 U1.4@5722.4,2401.58
IIC1_SDA10: IC23.8 U1.8 | length 1396.3
  Top Layer w8: IC23.8@5461.61,2880.67 5466.47,2885.53 5466.47,2911.97 5544.2,2989.7 5779.49,2989.7 5884.7,2884.5 5884.7,2386.76 5829.95,2332.02 5634.48,2332.02 U1.8@5564.92,2401.58
IIC1_SDA11: IC23.10 U1.12 | length 1721
  Top Layer w8: U1.12@5407.44,2401.58 5505,2304.02 5841.55,2304.02 5912.7,2375.16 5912.7,2896.09 5791.09,3017.7 5521.02,3017.7 5415.29,2911.97 5415.29,2885.53 IC23.10@5410.43,2880.67
IIC1_SDA12: IC23.13 U1.13 | length 181.7
  Top Layer w8: U1.13@5328.7,2480.32 5359.25,2510.87 IC23.13@5359.25,2649.33
IIC1_SDA13: IC23.15 U1.9 | length 200.4
  Top Layer w8: IC23.15@5410.43,2649.33 5410.43,2556.06 U1.9@5486.18,2480.32
IIC1_SDA14: IC23.17 U1.5 | length 273.1
  Top Layer w8: IC23.17@5461.61,2649.33 5466.47,2644.47 5466.47,2608.53 5540,2535 5588.98,2535 U1.5@5643.66,2480.32
IIC1_SDA15: IC23.19
LED0_PTD10: BTB2.56 LED2.2 | length 5423.9
  Top Layer w8: LED2.2@5029.52,160 v1(5085,160) ; v1(6495.87,2409.13) 6495.87,2410.87 6529.88,2444.88 BTB2.56@6568.5,2444.88
  Bottom Layer w8: v1(5085,160) 5117.69,160 5142.69,135 5730,135 6030,435 6030,810 5886.44,953.56 5021.44,953.56 4885,1090 4885,1440.2 5195,1750.2 5195,2095 5325,2225 5788.7,2225 5928.7,2365 6451.74,2365 v1(6495.87,2409.13)
lpHSD1_DSEL0_PTC12: BTB2.36 R15.1 | length 6756.6
  Top Layer w6: R15.1@984.57,3864.72 999.29,3850 R15.1@1000.28,3850 ; R15.1@990.28,3850 989.29,3850 926.99,3912.3 891.39,3912.3 885.01,3918.68 848.04,3918.68 842.77,3923.95 842.77,3928.49 841.26,3930 841.26,4019.09 1066.17,4244 3836,4244 4054,4026 4054,3847.82 4287.82,3614 5310.71,3614 5395.71,3529 6182.26,3529 6469.98,3241.28 6469.98,3177.57 6517.98,3129.57 6517.98,3119.25 6528,3109.23 6528,3094.71 6535.25,3087.46 6536.17,3087.46 6548.82,3074.8 BTB2.36@6568.5,3074.8
lpHSD1_DSEL1_PTC21: BTB2.33 R24.1 | length 6651.4
  Top Layer w6: R24.1@819.98,3850 805.26,3864.72 805.26,4034 1051.26,4280 3860,4280 4090,4050 4090,3862.73 4302.73,3650 5330,3650 5415,3565 6197.17,3565 6505.98,3256.2 6505.98,3211.22 6535.25,3181.94 6536.17,3181.94 6548.82,3169.29 BTB2.33@6568.5,3169.29
lpHSD1_IN0_PTC13: BTB2.38 R2.1 | length 6142.1
  Top Layer w6: R2.1@1255.28,3850 1255.28,3934.02 1529.26,4208 3820.94,4208 4018,4010.94 4018,3832.91 4272.91,3578 5295.79,3578 5380.79,3493 6120.61,3493 6493.98,3119.63 6493.98,3094.79 6516,3072.76 6516,3043.71 6535.25,3024.46 6536.17,3024.46 6548.82,3011.81 BTB2.38@6568.5,3011.81
lpHSD1_IN1_PTC18: BTB2.37 R6.1 | length 6331.1
  Top Layer w6: R6.1@1135.28,3850 1135.28,4071.7 1283.57,4220 3825.91,4220 4030,4015.91 4030,3837.88 4277.88,3590 5300.76,3590 5385.76,3505 6125.58,3505 6505.98,3124.6 6505.98,3099.76 6528,3077.73 6528,3063.21 6535.25,3055.96 6536.17,3055.96 6548.82,3043.31 BTB2.37@6568.5,3043.31
lpHSD1_IN2_PTC19: BTB2.35 R18.1 | length 6699
  Top Layer w6: R18.1@930.28,3850 929.64,3850 914.93,3864.72 914.93,3871.8 880.04,3906.68 843.07,3906.68 829.26,3920.49 829.26,4024.06 1061.2,4256 3844,4256 4066,4034 4066,3852.79 4292.79,3626 5315.68,3626 5400.68,3541 6187.23,3541 6481.98,3246.25 6481.98,3182.54 6529.98,3134.54 6529.98,3124.22 6535.25,3118.95 6536.17,3118.95 6548.82,3106.3 BTB2.35@6568.5,3106.3
lpHSD1_IN3_PTC20: BTB2.34 R21.1 | length 6670.5
  Top Layer w6: R21.1@870.28,3850 870.28,3876.72 852.32,3894.68 838.1,3894.68 817.26,3915.52 817.26,4029.03 1056.23,4268 3852,4268 4078,4042 4078,3857.76 4297.76,3638 5320.65,3638 5405.65,3553 6192.2,3553 6493.98,3251.22 6493.98,3191.72 6535.25,3150.45 6536.17,3150.45 6548.82,3137.8 BTB2.34@6568.5,3137.8
lpHSD1_IS_PTB1: BTB2.27 C10.2 R12.1 | length 6692
  Top Layer w6: 931.26,4086.26 1077,4232 3830.88,4232 4042,4020.88 4042,3842.85 4282.85,3602 5305.73,3602 5390.73,3517 6158.9,3517 v1(6442.95,3232.95) ; BTB2.27@6738.58,3137.8 6787.92,3137.8 6795.13,3145 v1(6800,3145)
  Top Layer w8: C10.2@870.28,3995.98 924.76,3995.98 R12.1@928.78,4000 ; R12.1@931.26,4002.48 931.26,4086.26
  Bottom Layer w6: v1(6442.95,3232.95) 6530.9,3145 v1(6800,3145)
lpHSD1_OUT0: C5.2 C7.2 D2.1 IC1.7 IC4.24 J5.1 J5.2 J6.1 J6.2 J7.34 R3.2 | length 3764.3
  Top Layer w20: IC4.24@1138.46,3493.23 1138.46,3474.35 1165.83,3446.99 1196.76,3446.99 1232.76,3410.98 R3.2@1232.76,3410
  Top Layer w35: IC1.7@996.26,3186.77 1000.96,3191.48 1000.96,3217.53 1031.94,3248.5 1090.79,3248.5 1092.29,3250 1151.15,3250 1220.14,3181.01 1220.14,3132.5 1221.54,3131.1 C5.2@1230,3131.1
  Top Layer w40: 1151.15,3250 1189.1,3250 1229.1,3290 v2(1231.26,3290) 1232.79,3291.53 1232.79,3349.56 C7.2@1233.23,3350 1232.76,3350.47 R3.2@1232.76,3410
  Top Layer w60: v5(1180,1905) 1180,1931.42 1229.65,1981.06 1229.65,1985 D2.1@1240,1995.35
  Bottom Layer w50: J6.1@1180,2320 J5.2@1180,2520 ; J6.2@1183.94,1784.57 1190.43,1778.07 1190.43,1774.13 1270,1694.57 1270,1205 1325,1150 1325,1139.95 1351.88,1113.07 1351.88,942.37 1325,915.48 1325,518.39 1487.98,355.41 1611.6,355.41 1685.2,429.01 J7.34@1685.2,445.04
  Bottom Layer w60: v5(1180,1905) 1180,1786.06 1181.5,1784.57 J6.2@1183.94,1784.57 ; J5.2@1180,2520 J5.1@1180,3055.43 1183.94,3055.43 1185.43,3056.93 1185.43,3060.87 1231.26,3106.69 v2(1231.26,3290)
lpHSD1_OUT1: C9.2 IC4.20 J7.33 J10.1 J10.2 J13.1 J13.2 R13.2 | length 3293.4
  Top Layer w20: R13.2@1036.1,3424.65 IC4.20@1036.1,3493.23
  Top Layer w40: R13.2@1049.76,3410 1049.76,3355.51 C9.2@1055.28,3350 1055.28,3300.28 v2(1055,3300)
  Bottom Layer w50: J10.2@1075,1784.57 1078.94,1784.57 1085.43,1778.07 1085.43,1759.57 1200,1645 1200,1195 1260,1135 1260,1125.75 1295.88,1089.87 1295.88,965.56 1260,929.68 1260,504.2 1464.78,299.41 1709.41,299.41 1842.68,432.68 J7.33@1842.68,445.04
  Bottom Layer w60: v2(1055,3300) 1075,3280 J13.1@1075,3055.43 J13.2@1075,2520 J10.1@1075,2320
lpHSD1_OUT2: C12.2 IC4.17 J7.32 J12.1 J12.2 J16.1 J16.2 R22.2 | length 3611
  Top Layer w20: IC4.17@959.33,3493.23 959.33,3443.43 R22.2@984.06,3418.7
  Top Layer w40: v2(989.01,3299) 990.54,3300.53 990.54,3347.78 992.76,3350 R22.2@992.76,3410
  Bottom Layer w50: J12.2@970,1784.57 973.94,1784.57 980.43,1778.07 980.43,1739.57 1135,1585 1135,1171.56 1239.88,1066.68 1239.88,988.76 1195,943.88 1195,490 1441.59,243.41 1813.41,243.41 2000.16,430.16 J7.32@2000.16,445.04
  Bottom Layer w60: J12.1@970,2320 J16.2@970,2520 J16.1@970,3055.43 970,3280 v2(989.01,3299)
lpHSD1_OUT3: C16.2 IC4.13 J7.31 J15.1 J15.2 J18.1 J18.2 R25.2 | length 3926.1
  Top Layer w20: R25.2@809.76,3410 817.48,3417.72 817.48,3434.86 856.97,3474.35 IC4.13@856.97,3493.23
  Top Layer w40: R25.2@809.76,3410 809.76,3355.51 C16.2@815.28,3350 815.28,3331.3 812.79,3328.81 812.79,3291.53 v2(811.26,3290)
  Bottom Layer w45: J15.2@865,1784.57 868.94,1784.57 877.93,1775.57 877.93,1742.07 1065,1555 1065,1076.37 1054.27,1065.64 1054.27,989.79 1130,914.06 1130,450 1400,180
  Bottom Layer w50: 1400,180 1892.6,180 J7.31@2157.64,445.04
  Bottom Layer w60: v2(811.26,3290) 811.26,3109.17 859.57,3060.87 859.57,3056.93 861.06,3055.43 J18.1@865,3055.43 J18.2@865,2520 J15.1@865,2320
lpHSD2_DSEL0_PTB27: BTB2.42 R46.1 | length 6129.5
  Top Layer w6: R46.1@1620.28,3850 1619.29,3850 1578.15,3891.14 1520.12,3891.14 1501.26,3910 1486.72,3910 1472.77,3923.95 1472.77,4030.6 1598.17,4156 3804,4156 3970,3990 3970,3810.3 4250.3,3530 5275.91,3530 5360.91,3445 6100.73,3445 6445.98,3099.75 6445.98,3074.91 6468,3052.88 6468,2965.73 6535.25,2898.48 6536.17,2898.48 6548.82,2885.83 BTB2.42@6568.5,2885.83
lpHSD2_DSEL1_PTB29: BTB2.39 R52.1 | length 6039
  Top Layer w6: R52.1@1440.28,3850 1440.28,3905.53 1436.77,3909.04 1436.77,4045.51 1587.26,4196 3815.97,4196 4006,4005.97 4006,3827.94 4267.94,3566 5290.82,3566 5375.82,3481 6115.64,3481 6481.98,3114.66 6481.98,3089.82 6504,3067.79 6504,3024.22 6535.25,2992.97 6536.17,2992.97 6548.82,2980.32 BTB2.39@6568.5,2980.32
lpHSD2_IN0_PTB25: BTB2.44 R33.1 | length 5499.6
  Top Layer w6: R33.1@1870.28,3850 1871.14,3850 1885.86,3864.72 1885.86,3871.57 2134.29,4120 3775,4120 3788.79,4120 3934,3974.79 3934,3961 3934,3795.38 4235.38,3494 5261,3494 5346,3409 6035.29,3409 6444,3000.29 6444,2926.74 6535.25,2835.49 6536.17,2835.49 6548.82,2822.83 BTB2.44@6568.5,2822.83
lpHSD2_IN1_PTB3: BTB2.43 R41.1 | length 5703.5
  Top Layer w6: R41.1@1750.28,3850 1751.26,3850 1765.98,3864.72 1765.98,4034.72 1863.26,4132 3783,4132 3793.76,4132 3946,3979.76 3946,3969 3946,3800.35 4240.35,3506 5265.97,3506 5350.97,3421 6040.26,3421 6456,3005.26 6456,2946.23 6535.25,2866.98 6536.17,2866.98 6548.82,2854.33 BTB2.43@6568.5,2854.33
lpHSD2_IN2_PTB28: BTB2.41 R49.1 | length 6086.1
  Top Layer w6: R49.1@1560.28,3850 1559.29,3850 1530.15,3879.14 1514.82,3879.14 1495.96,3898 1481.75,3898 1460.77,3918.98 1460.77,4035.57 1593.2,4168 3808.97,4168 3982,3994.97 3982,3818 4258,3542 5280.88,3542 5365.88,3457 6105.7,3457 6457.98,3104.72 6457.98,3079.88 6480,3057.85 6480,2985.22 6535.25,2929.98 6536.17,2929.98 6548.82,2917.32 BTB2.41@6568.5,2917.32
lpHSD2_IN3_PTB2: BTB2.40 R50.1 | length 6060.5
  Top Layer w6: R50.1@1500.28,3850 1500.28,3876.72 1490.99,3886 1476.78,3886 1448.77,3914.01 1448.77,4040.54 1588.23,4180 3815,4180 3994,4001 3994,3822.97 4262.97,3554 5285.85,3554 5370.85,3469 6110.67,3469 6469.98,3109.69 6469.98,3084.85 6492,3062.82 6492,3004.72 6535.25,2961.47 6536.17,2961.47 6548.82,2948.82 BTB2.40@6568.5,2948.82
lpHSD2_IS_PTB0: BTB2.19 C30.2 R44.1 | length 6077.4
  Top Layer w6: R44.1@1558.78,4000 1558.78,4047.52 1655.26,4144 3799.03,4144 3958,3985.03 3958,3805.32 4245.32,3518 5270.94,3518 5355.94,3433 6077.37,3433 v1(6420.98,3089.39) ; BTB2.19@6738.58,2885.83 6739.41,2885 v1(6800,2885)
  Top Layer w8: C30.2@1500.28,3995.98 1504.29,4000 R44.1@1558.78,4000
  Bottom Layer w6: v1(6420.98,3089.39) 6625.37,2885 v1(6800,2885)
lpHSD2_OUT0: C17.2 C23.2 D9.1 IC2.7 IC7.24 J7.21 J11.1 J11.2 J14.1 J14.2 R35.2 | length 3176.8
  Top Layer w20: IC7.24@1770.6,3493.23 1770.6,3474.35 1797.97,3446.99 1826.76,3446.99 1862.76,3410.98 R35.2@1862.76,3410
  Top Layer w35: IC2.7@1628.76,3186.77 1628.76,3219.79 1649.26,3240.29 1795.86,3240.29 1855.14,3181.01 1855.14,3132.5 1856.54,3131.1 C17.2@1865,3131.1
  Top Layer w40: 1795.86,3240.29 1809.39,3240.29 1859.1,3290 v2(1861.26,3290) ; v2@1859.73,3291.53 1859.73,3328.81 1857.24,3331.3 C23.2@1857.24,3350 1862.76,3355.51 R35.2@1862.76,3410
  Top Layer w60: v5(1810,1900) 1810,1936.77 1865,1991.77 D9.1@1865,1995.71
  Bottom Layer w25: J7.21@1921.42,602.52 1921.42,808.01
  Bottom Layer w50: J14.1@1820.43,1773.35 1950,1643.78 1950,836.59 1921.42,808.01
  Bottom Layer w60: v5(1810,1900) J14.1@1810,1784.57 1810,1783.78 J14.1@1820.43,1773.35 ; J14.2@1810,2320 J11.1@1810,2520 J11.2@1810,3055.43 1813.94,3055.43 1815.43,3056.93 1815.43,3060.87 1861.26,3106.69 v2(1861.26,3290)
lpHSD2_OUT1: C29.2 IC7.20 J7.22 J26.1 J26.2 J28.1 J28.2 R45.2 | length 2485.8
  Top Layer w20: IC7.20@1668.24,3493.23 1668.97,3492.5 1668.97,3456.58 1672.05,3453.5 1672.05,3417.72 R45.2@1679.76,3410
  Top Layer w40: R45.2@1679.76,3410 1679.76,3355.51 C29.2@1685.28,3350 1685.28,3292.9 v2(1684.18,3291.81)
  Bottom Layer w25: J7.22@1763.94,602.52 1763.94,808.01
  Bottom Layer w40: J7.22@1747.54,602.52 J7.22@1763.94,602.52
  Bottom Layer w50: J28.1@1705,1784.57 1708.94,1784.57 1715.43,1778.07 1715.43,1749.57 1850,1615 1850,974.54 1763.94,888.47 1763.94,808.01
  Bottom Layer w60: v2(1684.18,3291.81) 1705,3270.99 J26.2@1705,3055.43 J26.1@1705,2520 J28.2@1705,2320
lpHSD2_OUT2: C31.2 IC7.17 J7.23 J27.1 J27.2 J32.1 J32.2 R51.2 | length 2684.1
  Top Layer w20: IC7.17@1591.47,3493.23 1591.47,3441.29 1603.18,3429.57 1604.17,3429.57 1622.76,3410.98 R51.2@1622.76,3410
  Top Layer w40: v2(1618.24,3289.12) 1617.24,3290.12 C31.2@1617.24,3350 1622.76,3355.51 R51.2@1622.76,3410
  Bottom Layer w50: J32.1@1600,1784.57 1603.94,1784.57 1610.43,1778.07 1610.43,1744.57 1760,1595 1760,1195 1463.88,898.88 1463.88,895.97 1438.09,870.18 1438.09,722.88 1490.59,670.37 1547.54,670.37 1606.46,611.46 J7.23@1606.46,602.52
  Bottom Layer w60: J32.2@1600,2320 J27.1@1600,2520 J27.2@1600,3055.43 1600,3270.89 v2(1618.24,3289.12)
lpHSD2_OUT3: C33.2 IC7.13 J7.35 J31.1 J31.2 J36.1 J36.2 R53.2 | length 2807.8
  Top Layer w20: R53.2@1439.76,3410 1439.76,3410.98 1487.96,3459.18 1487.96,3492.09 IC7.13@1489.1,3493.23
  Top Layer w40: R53.2@1439.76,3410 1439.76,3355.51 C33.2@1445.28,3350 1442.79,3347.51 1442.79,3291.53 v2(1441.26,3290)
  Bottom Layer w50: J36.1@1495,1784.57 1498.94,1784.57 1533.57,1749.94 1533.57,1710.43 1660,1584 1660,1285 1407.88,1032.88 1407.88,919.17 1382.09,893.38 1382.09,590.66 J7.35@1527.72,445.04
  Bottom Layer w60: v2(1441.26,3290) 1441.26,3109.17 1489.57,3060.87 1489.57,3056.93 1491.06,3055.43 J31.2@1495,3055.43 J31.1@1495,2520 J36.2@1495,2320
lpHSD3_DSEL0_PTE17: BTB1.16 R73.1 | length 3750.5
  Top Layer w6: R73.1@2250.28,3850 2222.57,3850 2217.98,3854.6 2217.98,3871.44 2190.97,3898.45 2128.27,3898.45 2101.26,3925.46 2101.26,4016.06 2157.2,4072 3746.03,4072 3768.91,4072 3886,3954.91 3886,3932.03 3886,3775.5 4215.5,3446 4372.03,3446 4514,3304.03 4514,2859 4446.34,2791.34 BTB1.16@4376.38,2791.34
lpHSD3_DSEL1_PTE2: BTB1.13 R78.1 | length 3863.5
  Top Layer w6: R78.1@2070.28,3850 2070.28,3880.79 2065.26,3885.81 2065.26,4034 2139.26,4108 3767,4108 3783.82,4108 3922,3969.82 3922,3953 3922,3790.41 4230.41,3482 4393,3482 4550,3325 4550,2815 4431.85,2696.85 BTB1.13@4376.38,2696.85
lpHSD3_IN0_PTA0: BTB1.21 R65.1 | length 2930.8
  Top Layer w6: R65.1@2500.28,3850 2500.28,3929.02 2607.26,4036 3749,4036 3850,3935 3850,3760.59 4200.59,3410 4345.91,3410 4478,3277.91 4478,2978 4448.82,2948.82 BTB1.21@4376.38,2948.82
lpHSD3_IN1_PTD30: BTB1.20 R68.1 | length 3104.7
  Top Layer w6: R68.1@2380.28,3850 2381.26,3850 2395.98,3864.72 2395.98,3924.72 2416.87,3945.61 2416.87,3948.14 2422.14,3953.41 2424.67,3953.41 2519.26,4048 3727,4048 3757,4048 3862,3943 3862,3913 3862,3765.56 4205.56,3422 4353,3422 4490,3285 4490,2960 4447.32,2917.32 BTB1.20@4376.38,2917.32
lpHSD3_IN2_PTE18: BTB1.15 R75.1 | length 3773.2
  Top Layer w6: R75.1@2190.28,3850 2162.57,3850 2157.98,3854.6 2157.98,3871.44 2142.97,3886.45 2123.3,3886.45 2089.26,3920.49 2089.26,4021.03 2152.23,4084 3751,4084 3773.88,4084 3898,3959.88 3898,3937 3898,3780.47 4220.47,3458 4377,3458 4526,3309 4526,2854.03 4431.81,2759.84 BTB1.15@4376.38,2759.84
lpHSD3_IN3_PTE6: BTB1.14 R76.1 | length 3802.1
  Top Layer w6: R76.1@2130.28,3850 2129.29,3850 2077.26,3902.03 2077.26,4026 2147.26,4096 3759,4096 3778.85,4096 3910,3964.85 3910,3945 3910,3785.44 4225.44,3470 4385,3470 4538,3317 4538,2838 4428.35,2728.35 BTB1.14@4376.38,2728.35
lpHSD3_IS_PTD31: BTB1.19 C48.2 R70.1 | length 3335.4
  Top Layer w6: R70.1@2189.76,4000 2189.76,4024.76 2225,4060 3740,4060 3763.94,4060 3874,3949.94 3874,3926 3874,3770.53 4210.53,3434 4366,3434 4502,3298 4502,2947 4450,2895 4449.64,2895 4440.47,2885.83 BTB1.19@4376.38,2885.83
  Top Layer w8: C48.2@2130.28,3995.98 2185.75,3995.98 R70.1@2189.76,4000
lpHSD3_OUT0: C25.2 C42.2 D15.1 IC5.7 IC11.24 J7.17 J24.1 J24.2 J25.1 J25.2 R66.2 | length 3148.5
  Top Layer w20: IC11.24@2402.74,3493.23 2402.74,3474.35 2430.1,3446.99 2456.76,3446.99 2492.76,3410.98 R66.2@2492.76,3410
  Top Layer w35: IC5.7@2261.26,3186.77 2261.26,3212.82 2288.73,3240.29 2425.86,3240.29 2485.14,3181.01 2485.14,3132.5 2486.54,3131.1 C25.2@2495,3131.1
  Top Layer w40: 2425.86,3240.29 2439.39,3240.29 2489.1,3290 v2(2491.26,3290) ; v2@2489.73,3291.53 2489.73,3347.51 C42.2@2487.24,3350 2492.76,3355.51 R66.2@2492.76,3410
  Top Layer w60: v5(2440,1910) 2440,1926.77 2505,1991.77 D15.1@2505,1995.71
  Bottom Layer w25: J7.17@2551.34,602.52 2551.34,815.08
  Bottom Layer w50: J25.1@2440,1784.57 2440,1670 2465,1645 2465,1260 2551.34,1173.66 2551.34,815.08
  Bottom Layer w60: J25.1@2440,1784.57 v5(2440,1910) ; J25.2@2440,2320 J24.1@2440,2520 J24.2@2440,3055.43 2443.94,3055.43 2445.43,3056.93 2445.43,3060.87 2491.26,3106.69 v2(2491.26,3290)
lpHSD3_OUT1: C45.2 IC11.20 J7.18 J39.1 J39.2 J43.1 J43.2 R71.2 | length 2379.8
  Top Layer w20: R71.2@2300.37,3420.37 IC11.20@2300.37,3493.23
  Top Layer w40: R71.2@2309.76,3410 2309.76,3355.51 C45.2@2315.28,3350 2315.28,3291.91 v2(2315.23,3291.86)
  Bottom Layer w25: J7.18@2393.86,602.52 2393.86,808.01
  Bottom Layer w50: J43.1@2335,1784.57 2335,1680 2393.86,1621.14 2393.86,808.01
  Bottom Layer w60: v2(2315.23,3291.86) 2335,3272.1 J39.2@2335,3055.43 J39.1@2335,2520 J43.2@2335,2320